# EAGLE board PiDriverV2 (EAGLE 6.4)
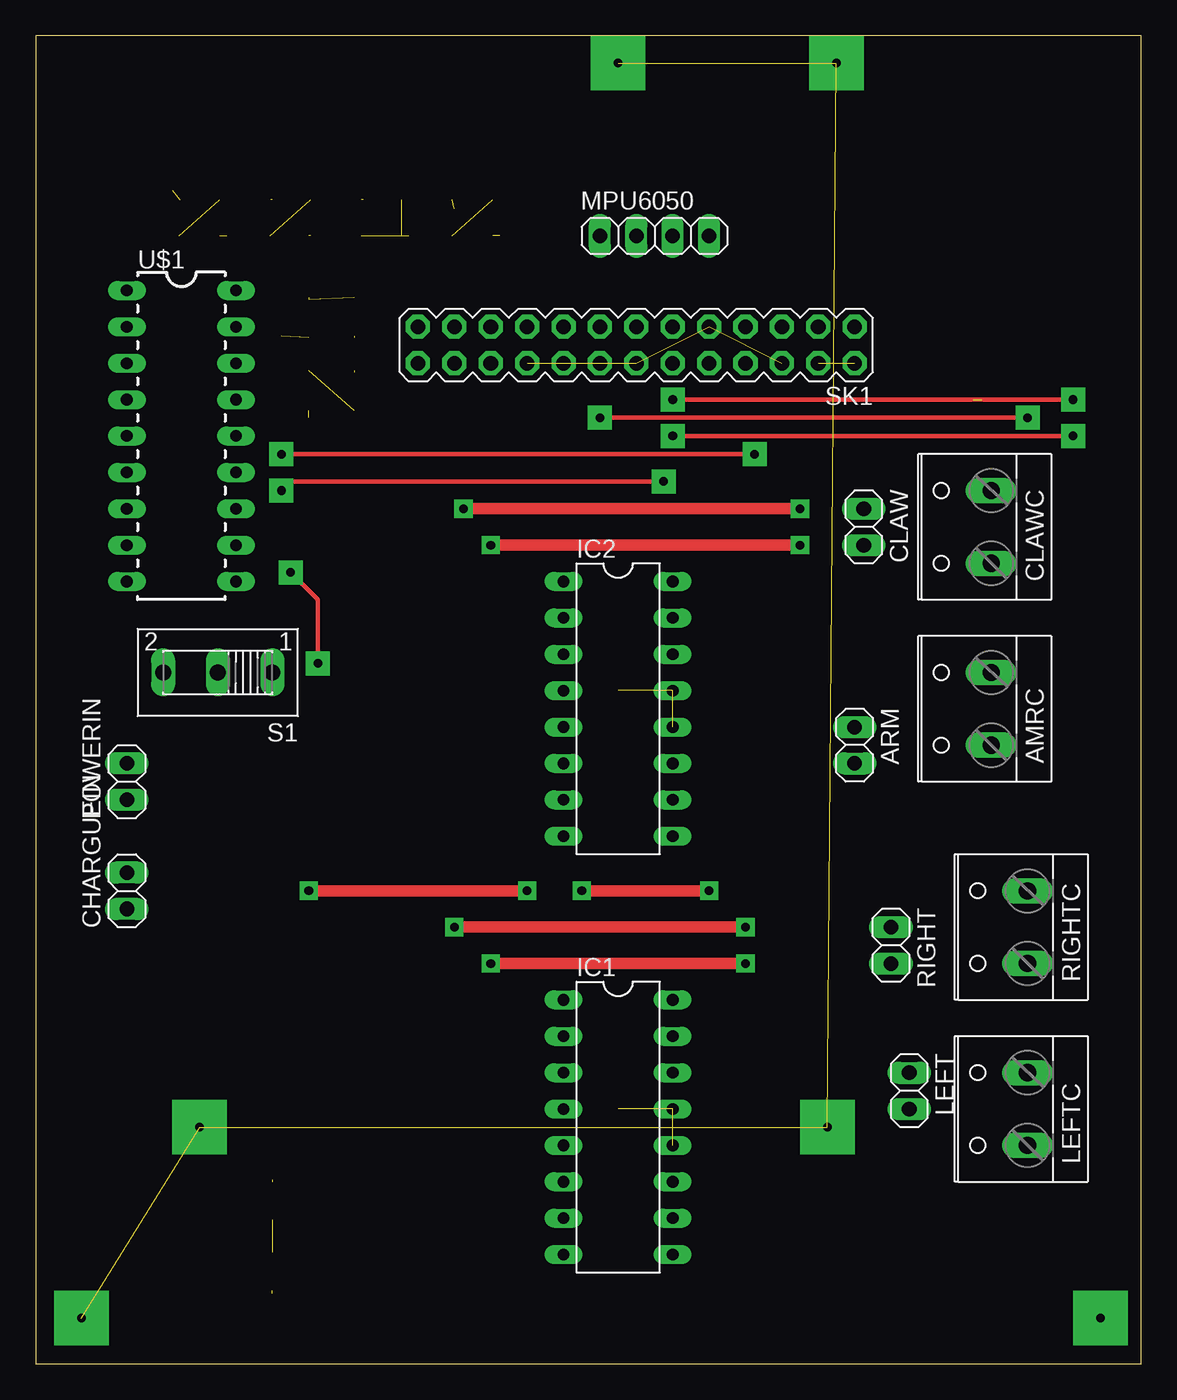
[diagram p0: board, top side]
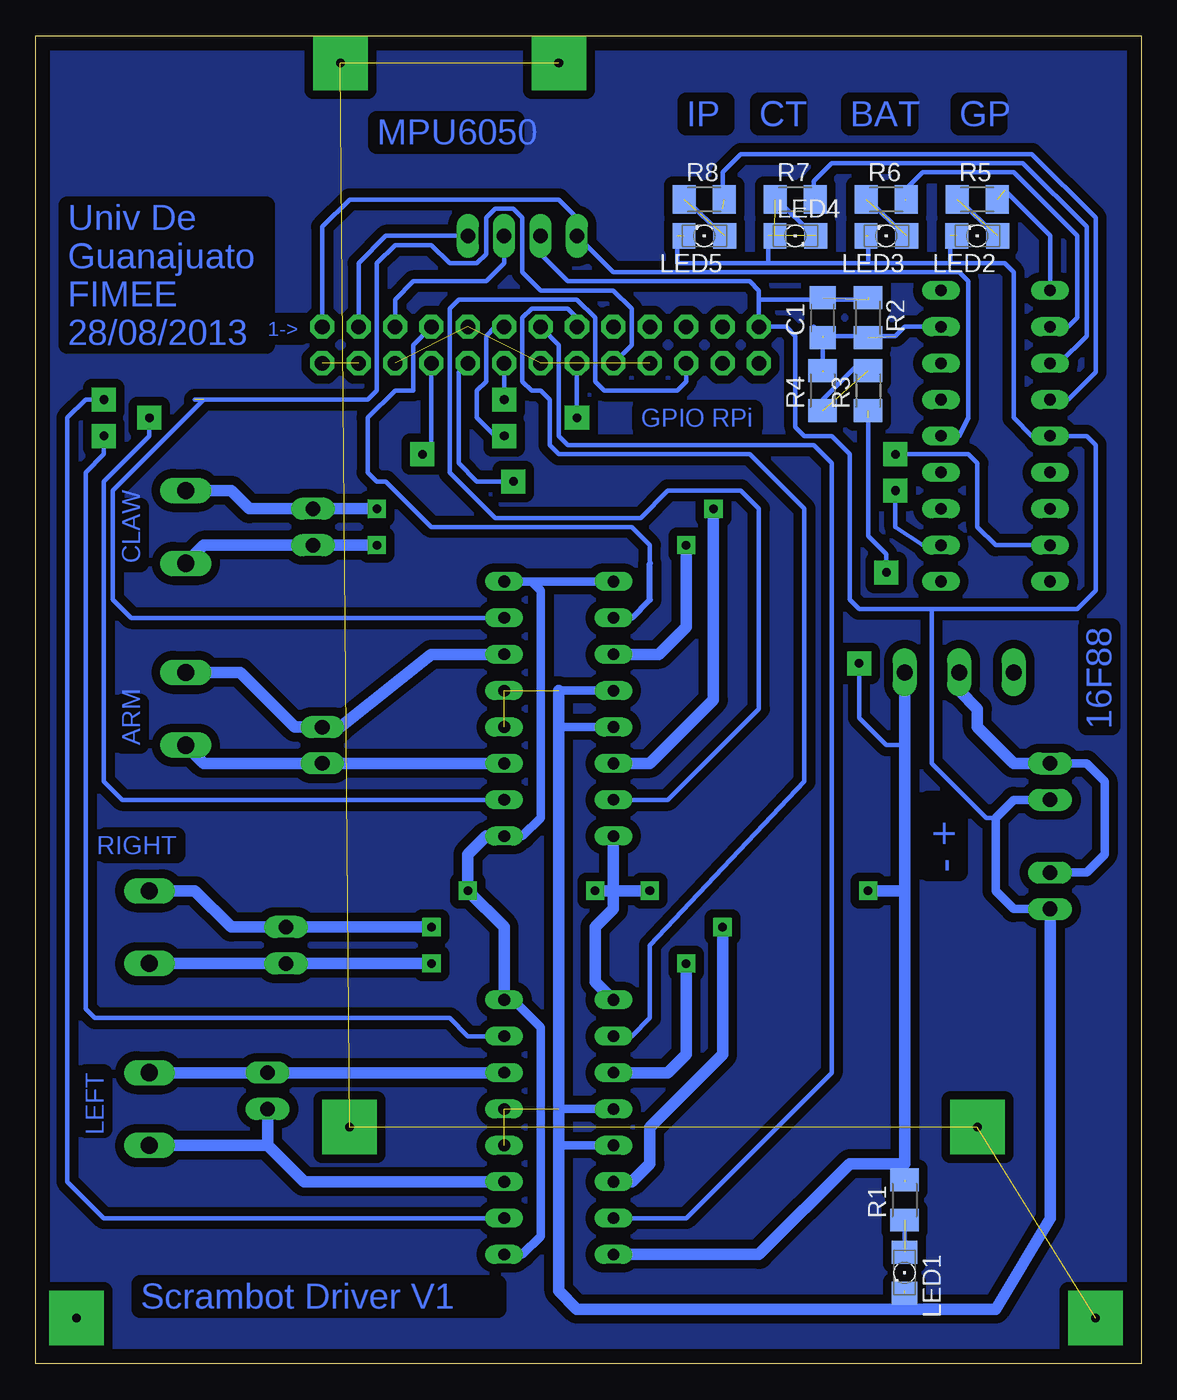
[diagram p1: board, bottom side, seen from below]

Size 77.14 x 92.7 mm. Coordinates in mm from the lower left corner, seen from the top.
Outline: 0,0 77.14,0 77.14,92.7 0,92.7 0,0
Copper layers (1*16): Top 0.035mm / dielectric 1.5mm / Bottom 0.035mm
Design rules "default": minimum track width 10mil, minimum drill 24mil, track to track 8mil, track to pad 8mil, pad to pad 8mil, via to via 8mil, smd to smd 8mil, copper to edge 40mil, drill to drill 8mil, minimum pad ring 10mil, minimum via ring 8mil, stop-mask expansion 4mil, vias tented up to drill 0mil, thermal gap 10mil

## Footprints (pad centres in the part's own frame; a part is rotated, then mirrored left to right if it is on the bottom)
W237-132 = drill 1.194 long: 1 -2.54,-0.635; 2 2.54,-0.635
1X02 = drill 1.016 long: 1 -1.27,0; 2 1.27,0
C1206 = smd 1.6 x 1.8: 1 -1.4,0; 2 1.4,0
DIL16 = drill 0.813 long: 1 -8.89,-3.81; 2 -6.35,-3.81; 3 -3.81,-3.81; 4 -1.27,-3.81; 5 1.27,-3.81; 6 3.81,-3.81; 7 6.35,-3.81; 8 8.89,-3.81; 9 8.89,3.81; 10 6.35,3.81; 11 3.81,3.81; 12 1.27,3.81; 13 -1.27,3.81; 14 -3.81,3.81; 15 -6.35,3.81; 16 -8.89,3.81
1206 = smd 1.6 x 1.803: A -1.422,0; C 1.422,0
1X04 = drill 1.016 long: 1 -3.81,0; 2 -1.27,0; 3 1.27,0; 4 3.81,0
M1206 = smd 1.6 x 2: 1 -1.4,0; 2 1.4,0
255SB = drill 1.118 long: 1 -3.81,0; 2 0,0; 3 3.81,0
GPIO-CONNECTOR = drill 1.016 pad 1.676 octagon: 1 -15.24,-1.27; 2 -15.24,1.27; 3 -12.7,-1.27; 4 -12.7,1.27; 5 -10.16,-1.27; 6 -10.16,1.27; 7 -7.62,-1.27; 8 -7.62,1.27; 9 -5.08,-1.27; 10 -5.08,1.27; 11 -2.54,-1.27; 12 -2.54,1.27; 13 0,-1.27; 14 0,1.27; 15 2.54,-1.27; 16 2.54,1.27; 17 5.08,-1.27; 18 5.08,1.27; 19 7.62,-1.27; 20 7.62,1.27; 21 10.16,-1.27; 22 10.16,1.27; 23 12.7,-1.27; 24 12.7,1.27; 25 15.24,-1.27; 26 15.24,1.27
DIL18 = drill 0.813 long: 1 -10.16,-3.81; 2 -7.62,-3.81; 3 -5.08,-3.81; 4 -2.54,-3.81; 5 0,-3.81; 6 2.54,-3.81; 7 5.08,-3.81; 8 7.62,-3.81; 9 10.16,-3.81; 10 10.16,3.81; 11 7.62,3.81; 12 5.08,3.81; 13 2.54,3.81; 14 0,3.81; 15 -2.54,3.81; 16 -5.08,3.81; 17 -7.62,3.81; 18 -10.16,3.81

## Placement (x,y rotation side)
AMRC  [W237-132]  66.04,45.72 90 top
ARM  [1X02]  57.15,43.18 270 top
C1  10uF  [C1206]  22.22,73.03 90 bottom
CHARGUEIN  [1X02]  6.35,33.02 90 top
CLAW  [1X02]  57.79,58.42 270 top
CLAWC  [W237-132]  66.04,58.42 90 top
IC1  L293E  [DIL16]  40.64,16.51 270 top
IC2  L293E  [DIL16]  40.64,45.72 270 top
LED1  [1206]  16.51,6.35 270 bottom
LED2  [1206]  11.43,78.74 180 bottom
LED3  [1206]  17.78,78.74 180 bottom
LED4  [1206]  24.13,78.74 0 bottom
LED5  [1206]  30.48,78.74 180 bottom
LEFT  [1X02]  60.96,19.05 270 top
LEFTC  [W237-132]  68.58,17.78 90 top
MPU6050  [1X04]  43.18,78.74 0 top
POWERIN  [1X02]  6.35,40.64 90 top
R1  [M1206]  16.51,11.43 90 bottom
R2  3.01k  [M1206]  19.05,73.03 270 bottom
R3  1k  [M1206]  19.05,67.94 90 bottom
R4  1k  [M1206]  22.22,67.94 90 bottom
R5  [M1206]  11.43,81.28 0 bottom
R6  [M1206]  17.78,81.28 0 bottom
R7  [M1206]  24.13,81.28 0 bottom
R8  [M1206]  30.48,81.28 0 bottom
RIGHT  [1X02]  59.69,29.21 270 top
RIGHTC  [W237-132]  68.58,30.48 90 top
S1  [255SB]  12.7,48.26 180 top
SK1  PI-GPIO-PTH  [GPIO-CONNECTOR]  41.91,71.12 180 top
U$1  PIC16F88-DIP  [DIL18]  10.16,64.77 270 top

## Library data of the parts
AMRC CLAWC LEFTC RIGHTC = con-wago-508; OC_FARNELL: unknown; OC_NEWARK: unknown
ARM CHARGUEIN CLAW LEFT MPU6050 POWERIN RIGHT = pinhead
C1 R1-R8 = rcl
IC1 IC2 = texas; MF: Arrow Electronics; MPN: L293E; OC_FARNELL: 1467711; OC_NEWARK: 89K0732
LED1-LED5 = led
S1 = switch
SK1 = jt-raspberry-pi
U$1 = SparkFun-DigitalIC

## Nets
+3V3: SK1.17
+5V0: SK1.2 SK1.4
ARMC: IC2.2 SK1.7
GND: SK1.6 SK1.9 SK1.14 SK1.20
HTX: SK1.8 U$1.8
N$1: LED1.A R1.1
N$2: LED2.A R5.1
N$3: CHARGUEIN.2 POWERIN.2 S1.2
N$4: IC1.1 IC1.8 IC1.9 IC1.16 IC2.1 IC2.8 IC2.9 IC2.16 R1.2 R3.1 S1.1
N$6: IC2.10 SK1.16
N$7: IC1.2 SK1.15
N$8: IC1.7 SK1.13
N$9: IC1.10 SK1.12
N$10: CLAW.2 CLAWC.1 IC2.3
N$12: AMRC.2 ARM.1 IC2.14
N$13: AMRC.1 ARM.2 IC2.11
N$14: IC1.6 RIGHT.1 RIGHTC.2
N$15: R6.2 U$1.2
N$16: IC1.11 LEFT.2 LEFTC.1
N$17: MPU6050.1 SK1.1 U$1.14
N$18: IC2.15 SK1.18
N$19: LED3.A R6.1
N$20: IC2.7 SK1.22
N$21: SK1.10 U$1.11
N$22: IC1.3 RIGHT.2 RIGHTC.1
N$23: CLAW.1 CLAWC.2 IC2.6
N$24: C1.2 CHARGUEIN.1 IC1.4 IC1.5 IC1.12 IC1.13 IC2.4 IC2.5 IC2.12 IC2.13 LED1.C LED2.C LED3.C LED4.C LED5.C MPU6050.2 POWERIN.1 R2.1 SK1.25 U$1.5
N$25: C1.1 R2.2 R4.2 U$1.17
N$26: IC1.15 SK1.11
N$28: R3.2 R4.1
N$31: IC1.14 LEFT.1 LEFTC.2
N$32: LED4.A R7.1
N$36: LED5.A R8.1
RA2: R5.2 U$1.1
RA4: R7.2 U$1.3
RA5: R8.2 U$1.4
SCL: MPU6050.3 SK1.5
SDA: MPU6050.4 SK1.3

## Tracks (layer width: path | path; a pad name or v marks a point on that pad's centre or on a via)
+5V0  (1 unrouted)
ARMC
  Bottom 0.305: 34.29,55.88 34.29,57.15 35.56,58.42 49.53,58.42 52.71,61.59 53.34,61.59 53.98,62.23 53.98,66.04 52.07,67.94 50.8,67.94 50.8,71.12 SK1.7
  Bottom 0.406: IC2.2 35.56,52.07 34.29,53.34 34.29,55.88
GND  (3 unrouted)
HTX  (via drill 0.6 pad 1.68)
  Top 0.305: v50.16,63.5 v17.14,63.5
  Bottom 0.305: SK1.8 49.53,64.14 v50.16,63.5 | U$1.8 10.16,57.15 11.43,58.42 11.43,62.87 12.06,63.5 15.88,63.5 v17.14,63.5
N$1  (1 unrouted)
N$2  (1 unrouted)
N$3
  Bottom 0.61: POWERIN.2 3.81,41.91 2.54,40.64 2.54,35.56 3.81,34.29 CHARGUEIN.2 | 12.7,46.99 S1.2
  Bottom 0.813: POWERIN.2 8.89,41.91 11.43,44.45 11.43,45.72 12.7,46.99
N$4  (via drill 0.6 pad 1.27, 0.6 pad 1.68)  (2 unrouted)
  Top 0.305: v19.68,48.9 19.68,53.34 v17.78,55.24
  Top 0.813: v19.05,33.02 v34.29,33.02 | v38.1,33.02 v46.99,33.02
  Bottom 0.305: 16.51,13.97 16.51,12.7 | 16.51,43.18 17.78,43.18 19.68,45.09 v19.68,48.9 | v17.78,55.24 17.78,56.52 19.05,57.78 19.05,66.04
  Bottom 0.61: IC2.9 43.18,36.83 41.91,38.1 41.91,53.98 42.55,54.61 IC2.16 IC2.1 | IC1.16 43.82,25.4 41.91,23.5 41.91,8.89 43.18,7.62 IC1.9
  Bottom 0.813: S1.1 16.51,43.18 16.51,33.02 | 16.51,33.02 16.51,13.97 20.32,13.97 26.67,7.62 IC1.8 | 16.51,33.02 v19.05,33.02 | v34.29,33.02 36.83,33.02 | 36.83,33.02 v38.1,33.02 | IC2.8 36.83,33.02 | IC2.9 45.72,36.83 46.99,35.56 v46.99,33.02 44.45,30.48 IC1.16 | 36.83,33.02 36.83,31.75 38.1,30.48 38.1,26.67 IC1.1
N$5
  Bottom 0.305: 16.51,10.16 16.51,7.62
N$6  (via drill 0.6 pad 1.68)
  Top 0.305: v69.21,66.04 v39.37,66.04
  Bottom 0.305: IC2.10 71.12,39.37 72.39,40.64 72.39,61.59 69.21,64.77 v69.21,66.04 | v39.37,66.04 SK1.16
N$7
  Bottom 0.305: IC1.2 35.56,22.86 34.29,24.13 34.29,29.21 23.49,40.64 23.49,59.69 27.3,63.5 40.64,63.5 41.28,64.14 41.28,67.31 41.91,67.94 42.55,67.94 43.18,68.58 43.18,73.03 42.55,73.66 40.01,73.66 39.37,73.03 SK1.15
N$8
  Bottom 0.305: IC1.7 31.75,10.16 21.59,20.32 21.59,62.87 22.86,64.14 40.01,64.14 40.64,64.77 40.64,71.12 SK1.13
N$9  (via drill 0.6 pad 1.68)
  Top 0.305: v72.39,67.31 v44.45,67.31
  Bottom 0.305: v72.39,67.31 73.66,67.31 74.93,66.04 74.93,12.7 72.39,10.16 IC1.10 | v44.45,67.31 SK1.12
N$10  (via drill 0.6 pad 1.27)
  Top 0.813: v31.75,57.15 v53.34,57.15
  Bottom 0.813: IC2.3 33.66,49.53 31.75,51.44 v31.75,57.15 | v53.34,57.15 CLAW.2 65.41,57.15 CLAWC.1
N$11
  pour Bottom (isolate 0.61): 0,92.71 0,0 77.47,0 77.47,92.71
N$12
  Bottom 0.813: IC2.14 49.53,49.53 55.88,44.45 ARM.1 59.05,44.45 62.87,48.26 AMRC.2
N$13
  Bottom 0.813: IC2.11 ARM.2 65.41,41.91 AMRC.1
N$14  (via drill 0.6 pad 1.27)
  Top 0.813: v49.53,30.48 v29.21,30.48
  Bottom 0.813: IC1.6 35.56,12.7 34.29,13.97 34.29,16.51 29.21,21.59 v29.21,30.48 | v49.53,30.48 RIGHT.1 63.5,30.48 66.04,33.02 RIGHTC.2
N$15  (1 unrouted)
  Bottom 0.305: 16.51,81.28 16.51,81.92 15.24,83.19 8.89,83.19 4.44,78.74 4.44,73.03 5.08,72.39 U$1.2
N$16
  Bottom 0.813: IC1.11 58.42,12.7 60.96,15.24 | 60.96,15.24 LEFT.2 | 60.96,15.24 LEFTC.1
N$17
  Bottom 0.305: SK1.1 57.15,79.38 55.25,81.28 40.64,81.28 39.37,80.01 MPU6050.1 36.83,76.2 12.7,76.2 12.06,75.56 12.06,66.04 12.7,64.77 U$1.14
N$18  (1 unrouted)
  Bottom 0.305: 66.04,67.31 53.98,67.31 53.34,67.94 53.34,76.83 52.07,78.11 49.53,78.11 48.26,76.83 46.36,76.83 45.72,77.47 45.72,80.01 45.09,80.64 43.82,80.64 43.18,80.01 43.18,76.2 41.91,74.93 36.83,74.93 35.56,73.66 35.56,71.12 SK1.18 | 65.41,67.31 71.75,60.96 71.75,53.34 70.48,52.07 IC2.15
N$19  (1 unrouted)
N$20
  Bottom 0.305: IC2.7 33.02,39.37 26.67,45.72 26.67,59.69 27.94,60.96 33.02,60.96 34.93,59.05 45.09,59.05 48.26,62.23 48.26,73.66 47.62,74.3 39.37,74.3 38.1,73.03 38.1,68.58 37.47,67.94 32.39,67.94 31.75,68.58 SK1.22
N$21  (via drill 0.6 pad 1.68)
  Top 0.305: v43.82,61.59 17.78,61.59 v17.14,60.96
  Bottom 0.305: v43.82,61.59 46.36,61.59 47.62,62.87 47.62,69.22 SK1.10 | U$1.11 15.24,57.15 17.14,58.42 v17.14,60.96
N$22  (via drill 0.6 pad 1.27)
  Top 0.813: v31.75,27.94 v49.53,27.94
  Bottom 0.813: IC1.3 33.02,20.32 31.75,21.59 v31.75,27.94 | v49.53,27.94 RIGHT.2 RIGHTC.1
N$23  (via drill 0.6 pad 1.27)
  Top 0.813: v29.85,59.69 v53.34,59.69
  Bottom 0.813: IC2.6 34.29,41.91 29.85,46.35 v29.85,59.69 | v53.34,59.69 CLAW.1 62.23,59.69 63.5,60.96 CLAWC.2
N$24  (11 unrouted)
  Bottom 0.305: 10.16,38.1 10.79,38.1 14.61,41.91 14.61,52.7 | 26.67,74.3 SK1.25 24.76,72.39 24.13,71.75 24.13,65.41 23.49,64.77 21.59,64.77 20.32,63.5 20.32,53.34 19.68,52.7 14.61,52.7 | 26.67,74.3 26.67,74.93 27.3,75.56 40.01,75.56 41.91,77.47 MPU6050.2 | 14.61,52.7 4.44,52.7 3.17,53.98 3.17,64.14 3.81,64.77 U$1.5 7.62,64.77 8.89,66.04 8.89,76.2 9.52,76.83 13.33,76.83 | 19.05,74.3 26.67,74.3 | 13.33,76.83 19.05,76.83 | 19.05,76.83 26.04,76.83 | 26.04,76.83 32.39,76.83 32.39,78.74 | 26.04,78.74 26.04,76.83 | 19.05,78.74 19.05,76.83 | 13.33,78.74 13.33,76.83
  Bottom 0.61: CHARGUEIN.1 8.89,31.75 10.16,33.02 10.16,38.1 8.89,39.37 POWERIN.1 | IC2.4 40.64,46.99 | IC2.5 40.64,44.45 | IC1.4 40.64,17.78 | IC1.5 40.64,15.24 | 16.51,5.08 16.51,3.81
  Bottom 0.813: CHARGUEIN.1 6.35,10.16 10.16,3.81 16.51,3.81 39.37,3.81 40.64,5.08 40.64,15.24 40.64,17.78 40.64,44.45 40.64,46.99
N$25  (3 unrouted)
  Bottom 0.305: 22.86,72.39 22.22,71.75 | U$1.17 16.51,72.39 17.14,71.75 22.22,71.75 | 22.22,71.75 22.22,69.22
N$26  (via drill 0.6 pad 1.68)
  Top 0.305: v44.45,64.77 v72.39,64.77
  Bottom 0.305: IC1.15 46.99,22.86 48.26,24.13 73.02,24.13 73.66,24.77 73.66,62.23 72.39,63.5 v72.39,64.77 | SK1.11 45.09,72.39 45.72,71.75 45.72,68.58 46.36,67.94 46.36,66.04 45.09,64.77 v44.45,64.77
N$27
  Bottom 0.305: 19.05,69.85 19.68,69.85 22.22,67.31
N$28  (1 unrouted)
N$30
  Bottom 0.305: 10.16,78.74 12.7,81.28
N$31
  Bottom 0.813: IC1.14 LEFT.1 LEFTC.2
N$32  (1 unrouted)
N$33
  Bottom 0.305: 16.51,78.74 19.05,81.28
N$34  (via drill 0.6 pad 3.81)  (4 unrouted)
  other vias: 3.17,3.17 55.25,16.51 11.43,16.51 40.64,90.81 55.88,90.81
N$35  (via drill 0.6 pad 3.81)
  other vias: 74.3,3.17
N$36  (1 unrouted)
N$37
  Bottom 0.305: 22.86,78.74 25.4,81.28
N$38
  Bottom 0.305: 29.21,78.74 31.75,81.28
RA2  (1 unrouted)
  Bottom 0.305: U$1.1 6.35,78.74 9.52,81.92
RA4  (1 unrouted)
  Bottom 0.305: U$1.3 5.72,69.85 3.81,71.75 3.81,79.38 8.25,83.82 21.59,83.82 22.86,82.55 22.86,81.28
RA5  (1 unrouted)
  Bottom 0.305: U$1.4 5.08,67.31 3.17,69.22 3.17,80.01 7.62,84.45 27.94,84.45 29.21,83.19 29.21,80.64
SCL
  Bottom 0.305: MPU6050.3 44.45,76.83 45.72,75.56 50.8,75.56 52.07,74.3 SK1.5
SDA
  Bottom 0.305: MPU6050.4 52.71,78.74 54.61,76.83 SK1.3

## Text on the board
Bottom: GP | BAT | CT | IP | MPU6050 | 1-> | Univ De / Guanajuato / FIMEE / 28/08/2013 | GPIO RPi | CLAW | 16F88 | ARM | RIGHT | - + | LEFT | Scrambot Driver V1